# Altium PCB SpectrumAnalyserRecruitProjCallum.PcbDoc
Units mm, origin at the board's own origin, x right, y up, seen from the top; angles counter-clockwise.
Board outline 66 x 54 mm, 2 copper layers (Top Layer, Bottom Layer); 36 components, 32 nets, 102 pads, 6 vias.
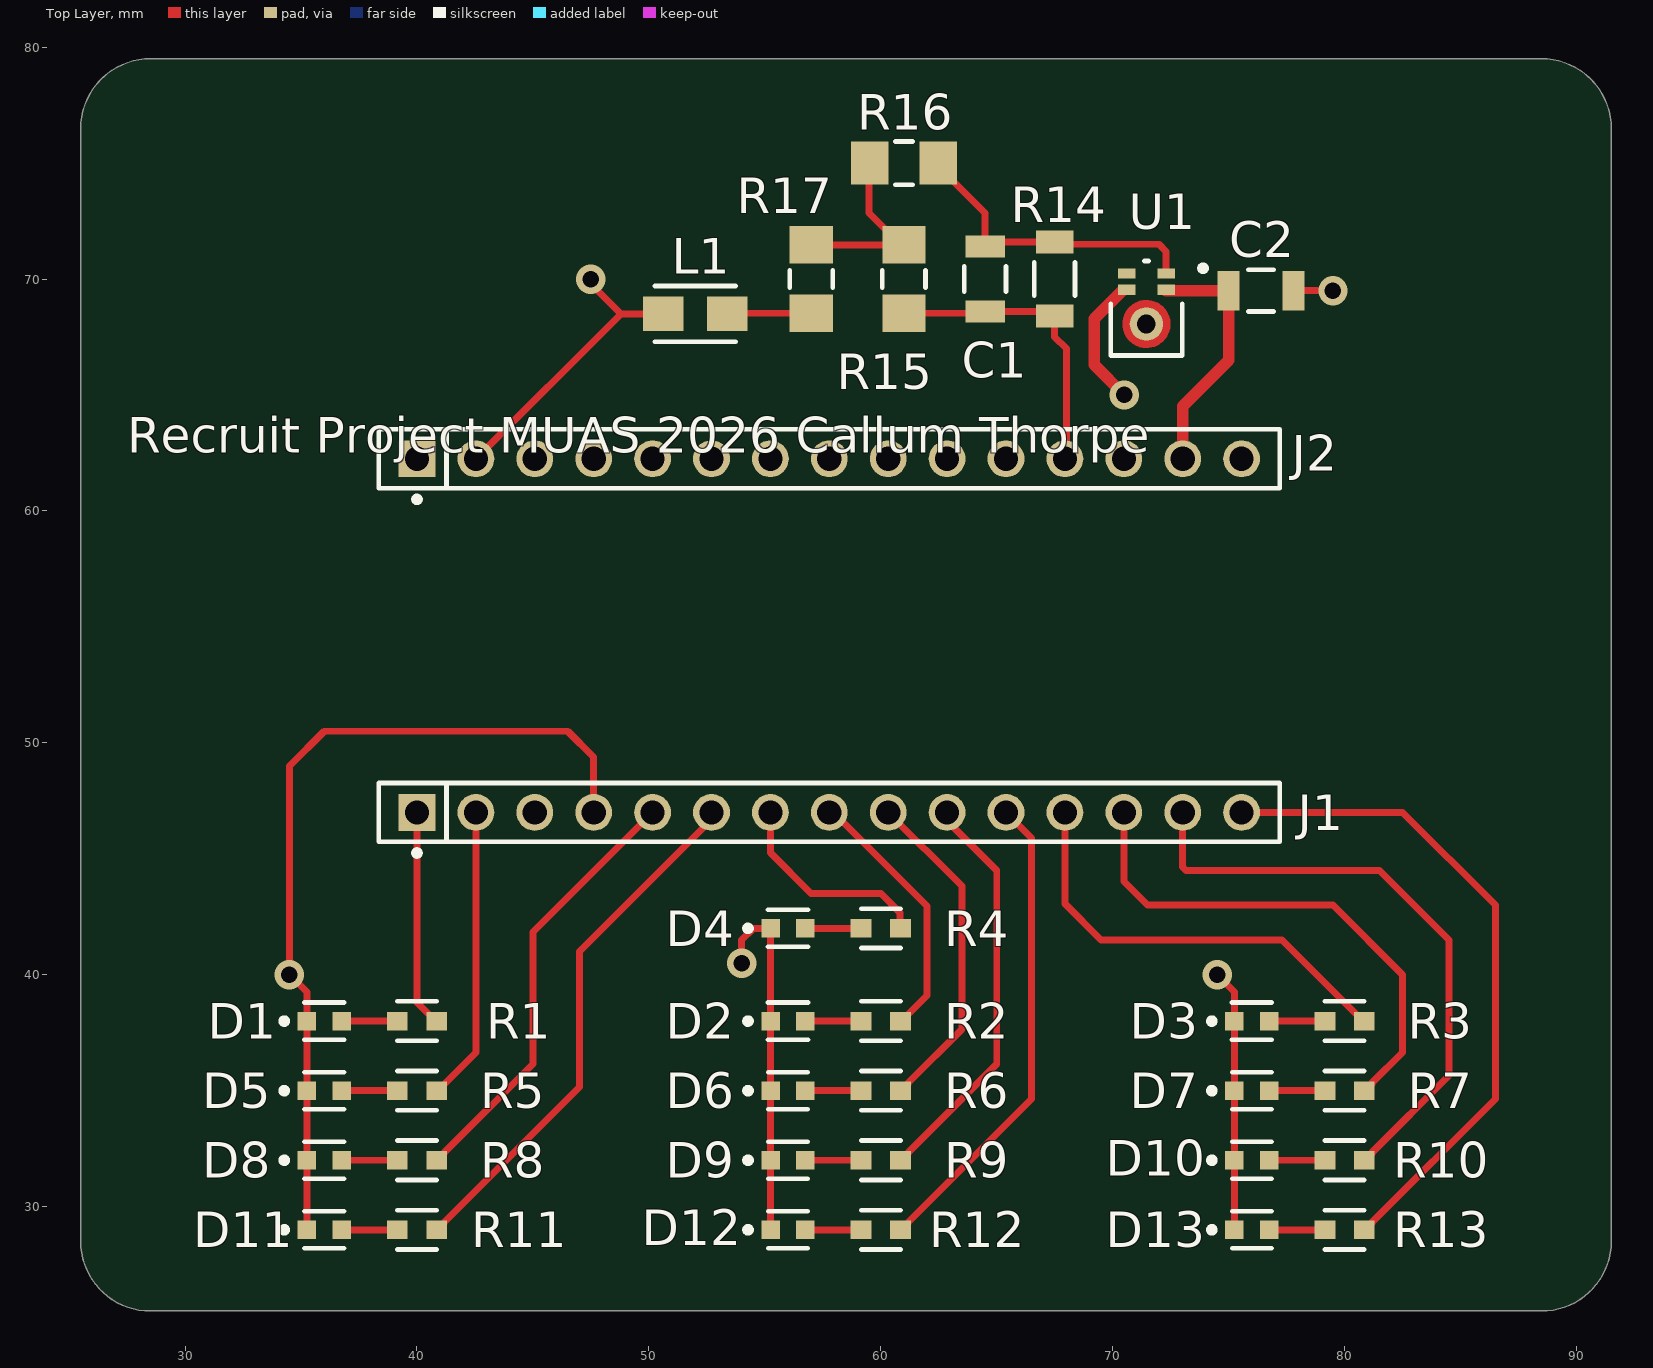
[diagram p0: Top Layer view]
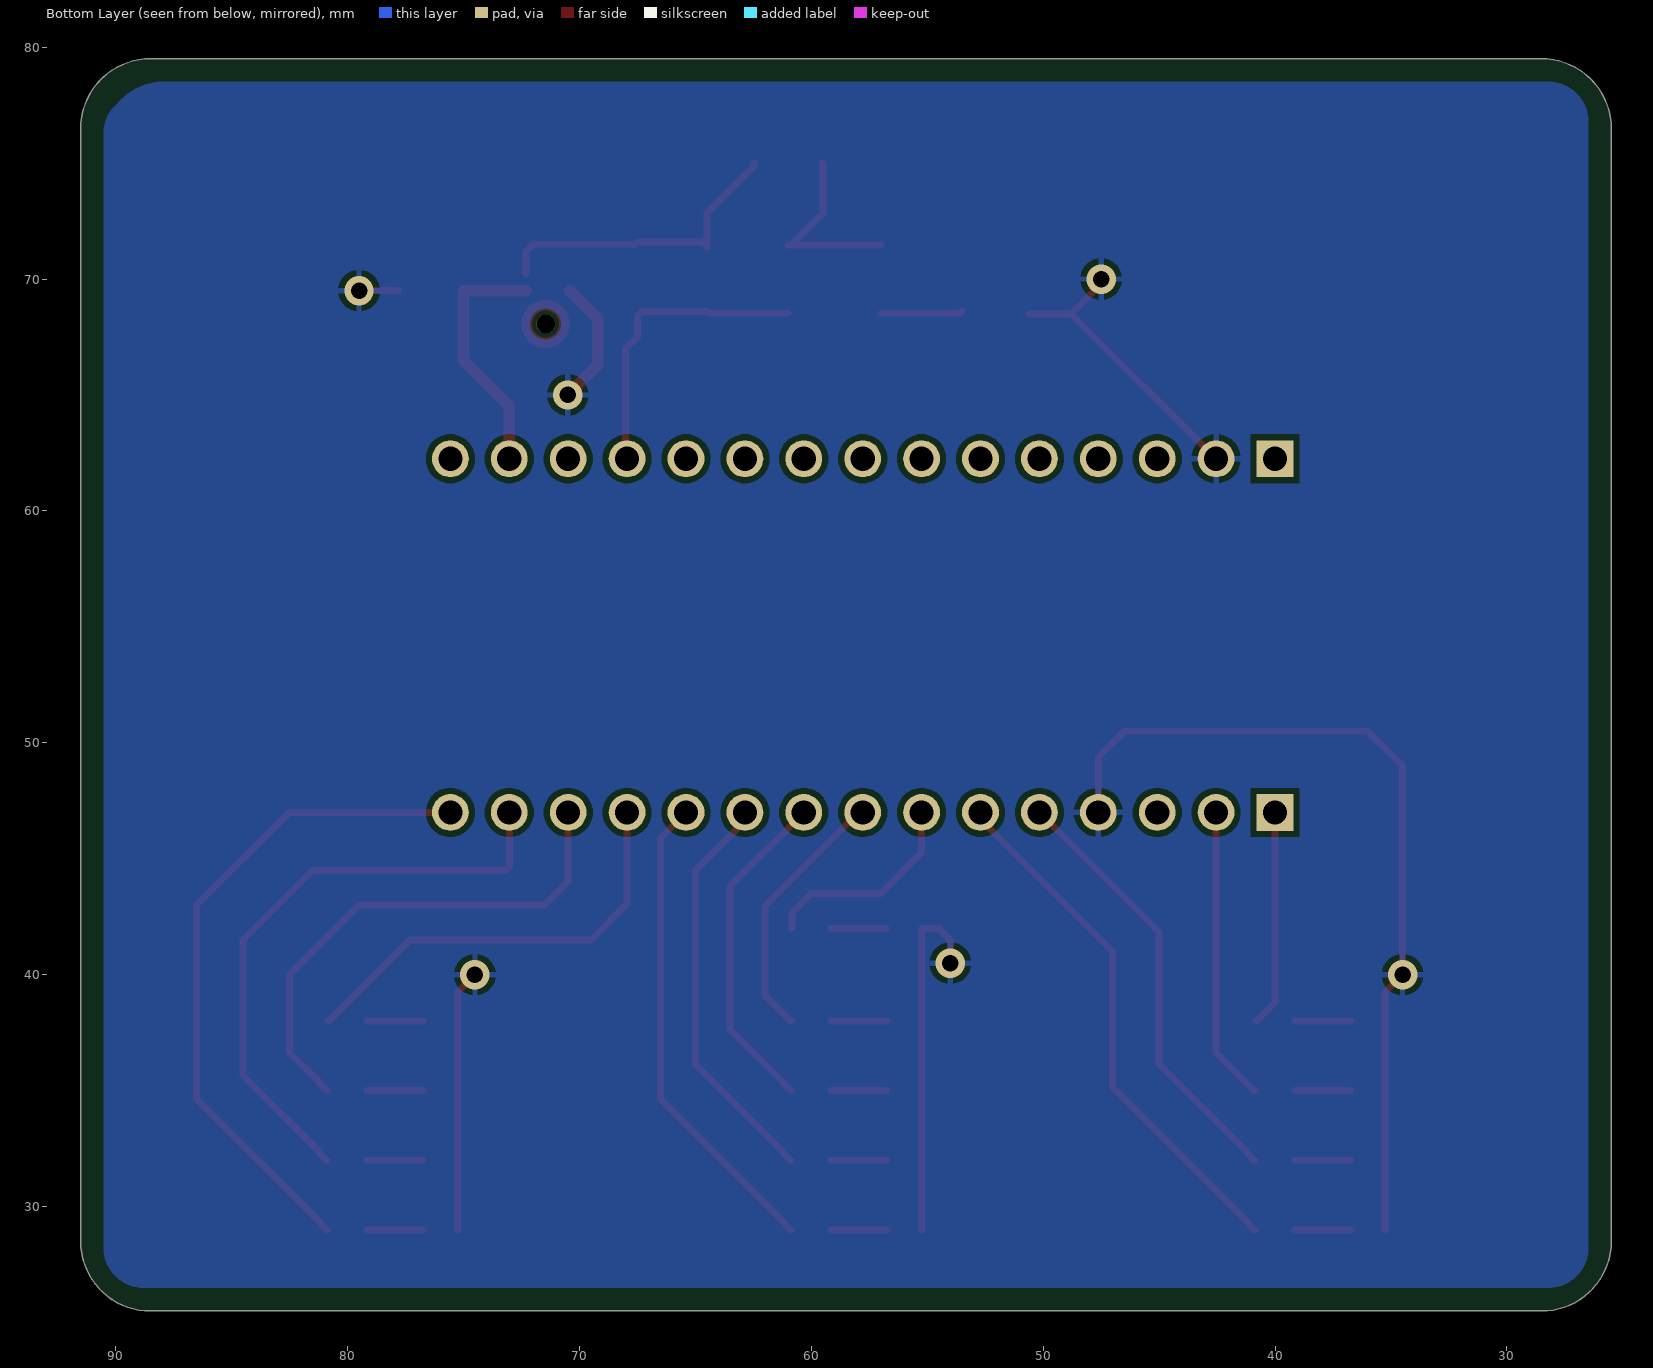
[diagram p1: Bottom Layer view, seen from below]
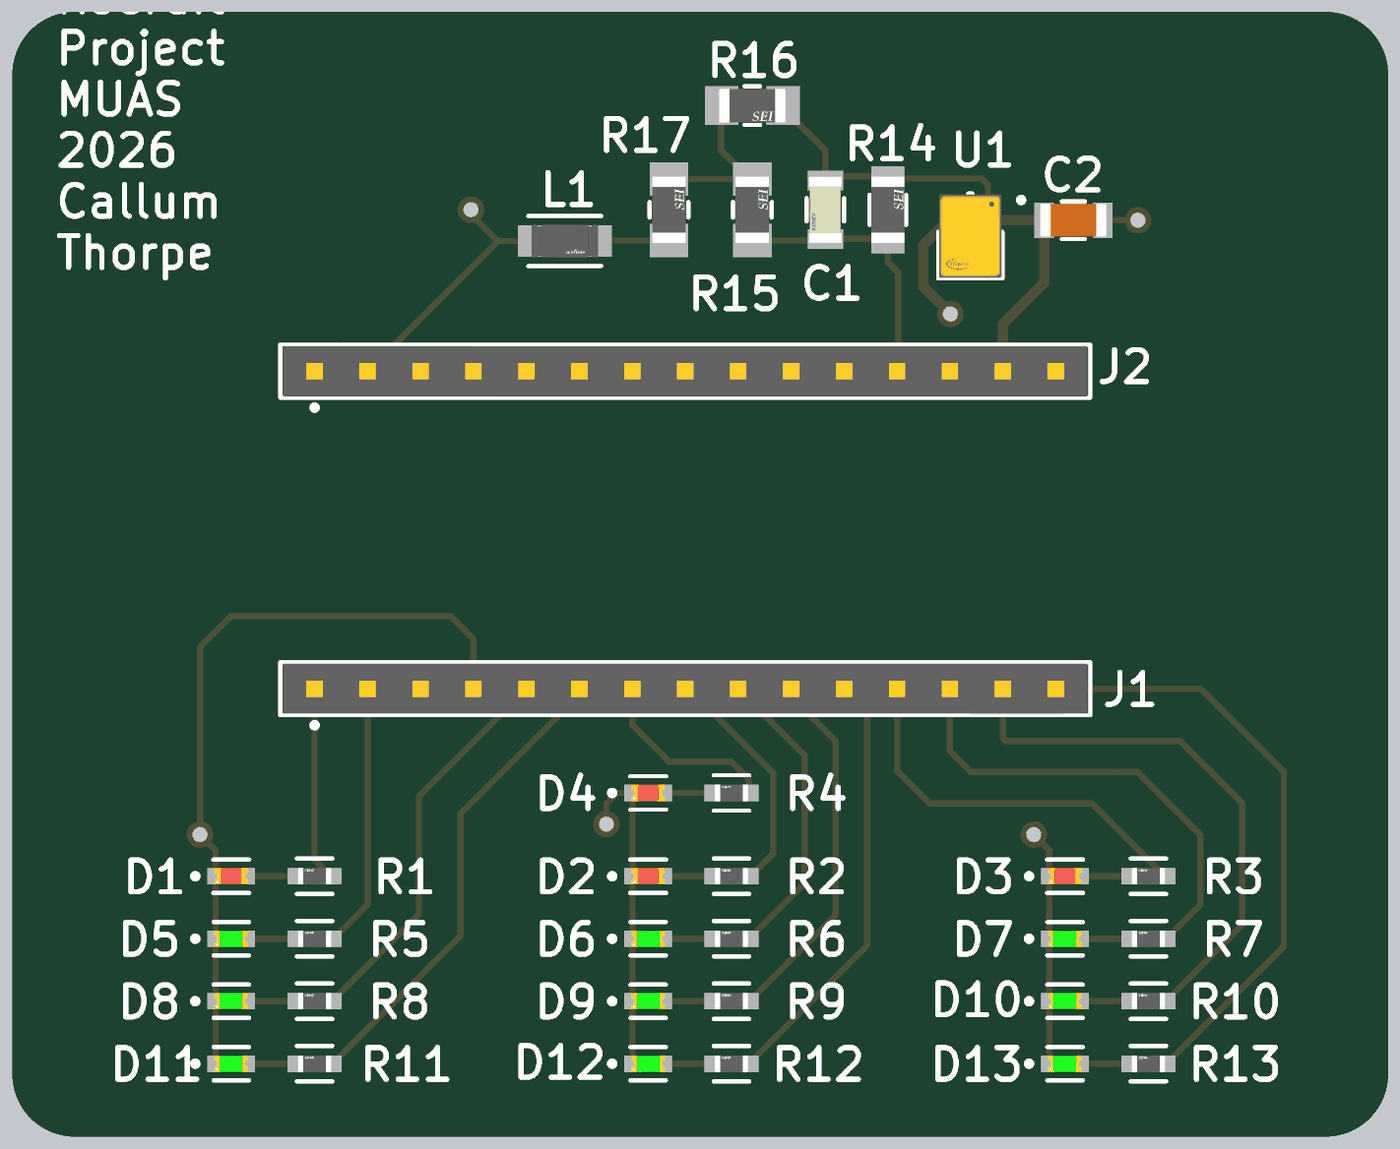
[diagram p2: 3D render of the assembled board from above, using the file's embedded part models]

## Layer stack, top to bottom
Top Solder: solder mask 0.0102, Solder Resist, Dk 3.5
Top Layer: signal copper 0.0356
Dielectric 1: dielectric 0.32, FR-4, Dk 4.8
Bottom Layer: signal copper 0.0356
Bottom Solder: solder mask 0.0102, Solder Resist, Dk 3.5

## Board outline
25.5,28.5 25.5,76.5 cw(c28.5,76.5) 28.5,79.5 88.5,79.5 cw(c88.5,76.5) 91.5,76.5 91.5,28.5 cw(c88.5,28.5) 88.5,25.5 28.5,25.5 cw(c28.5,28.5)

## Design rules (kind name [scope] priority, off if disabled: settings)
AssemblyTestPointUsage [All] p1: isadvanced=TRUE
AssemblyTestpoint [All] p1: isadvanced=TRUE testpointundercomponent=TRUE minsize=1.016 maxsize=2.54 preferedsize=1.524 minholesize=0 maxholesize=1.016 preferedholesize=0.813 testpointgrid=0.025 usegrid=TRUE gridtolerance=0 allowsidetop=TRUE allowsidebottom=TRUE
Clearance Clearance_1 [OnMid vs OnMid] p1: gap=0.25 ignorepadtopadclearanceinfootprint=FALSE sourcerule=39 cellrowname=All cellrowtype=0 cellcolname=All cellcoltype=0 innerlayers=TRUE
Clearance Clearance_2 [(ExistsOnLayer('Top Layer') Or ExistsOnLayer('Bottom Layer')) vs (ExistsOnLayer('Top Layer') Or ExistsOnLayer('Bottom Layer'))] p2: gap=0.25 ignorepadtopadclearanceinfootprint=FALSE sourcerule=39 cellrowname=All cellrowtype=0 cellcolname=All cellcoltype=0 outerlayers=TRUE
Clearance [All] p3: gap=0.254 ignorepadtopadclearanceinfootprint=FALSE ismatrix=TRUE
ComponentClearance [All] p1: isadvanced=TRUE gap=0.254 collisioncheckmode=3 verticalgap=0.254 showdistances=FALSE
FabricationTestPointUsage [All] p1: isadvanced=TRUE valid=0 allowmultiple=FALSE
FabricationTestpoint [All] p1: isadvanced=TRUE side=3 testpointundercomponent=TRUE minsize=1.016 maxsize=2.54 preferedsize=1.524 minholesize=0 maxholesize=1.016 preferedholesize=0.813 testpointgrid=0.025 allowsidetop=TRUE allowsidebottom=TRUE usegrid=TRUE gridtolerance=0
FanoutControl Fanout_BGA [IsBGA] p1: isadvanced=TRUE bgadir=Out bgaviamode=Centered fanoutstyle=Auto fanoutdirection=Alternating viagrid=0.025 // Fanout_BGA (Default Rule)
FanoutControl Fanout_LCC [IsLCC] p2: isadvanced=TRUE bgadir=Out bgaviamode=Centered fanoutstyle=Auto fanoutdirection=Alternating viagrid=0.025 // Fanout_LCC (Default Rule)
FanoutControl Fanout_SOIC [IsSOIC] p3: isadvanced=TRUE bgadir=Out bgaviamode=Centered fanoutstyle=Auto fanoutdirection=Alternating viagrid=0.025 // Fanout_SOIC (Default Rule)
FanoutControl Fanout_Small [(CompPinCount < 5)] p4: isadvanced=TRUE bgadir=Out bgaviamode=Centered fanoutstyle=Auto fanoutdirection=OutThenIn viagrid=0.025 // Fanout_Small (Default Rule)
FanoutControl Fanout_Default [All] p5: isadvanced=TRUE bgadir=Out bgaviamode=Centered fanoutstyle=Auto fanoutdirection=Alternating viagrid=0.025 // Fanout_Default (Default Rule)
Height [All] p1: isadvanced=TRUE minheight=0 maxheight=25.4 prefheight=12.7
HoleSize [All] p1: isadvanced=TRUE absolutevalues=TRUE maxlimit=2.54 minlimit=0.025 maxpercent=80.000 minpercent=20.000
HoleToHoleClearance [All] p1: isadvanced=TRUE gap=0.254 allowstackedmicrovias=TRUE
LayerPairs [All] p1: isadvanced=TRUE enforce=TRUE
MinimumSolderMaskSliver [All] p1: isadvanced=TRUE minsoldermaskwidth=0.15
NetAntennae [All] p1: isadvanced=TRUE netantennaetolerance=0
PasteMaskExpansion [All] p1: isadvanced=TRUE expansion=0
PlaneClearance [All] p1: isadvanced=TRUE clearance=0.508
PlaneConnect [All] p1: isadvanced=TRUE planeconnectstyle=Relief reliefexpansion=0.508 reliefentries=4 reliefconductorwidth=0.254 reliefairgap=0.254
PolygonConnect [All] p1: connectstyle=Relief reliefconductorwidth=0.254 reliefentries=4 polygonreliefangle="90 Angle" airgapwidth=0.254
RoutingCorners [All] p1: isadvanced=TRUE cornerstyle=45-Degree minsetback=2.54 maxsetback=2.54
RoutingPriority [All] p1: isadvanced=TRUE routingpriority=0
RoutingVias [All] p1: holewidth=0.711 width=1.27 viastyle="Through Hole" minholewidth=0.711 minwidth=1.27 maxholewidth=0.711 maxwidth=1.27
ShortCircuit [All] p1: isadvanced=TRUE allowed=FALSE
SilkToSilkClearance [All] p1: isadvanced=TRUE silktosilkclearance=0.254
SilkToSolderMaskClearance [IsPad] p1: isadvanced=TRUE minsilkscreentomaskgap=0.2 clearancetoexposedcopper=TRUE
SolderMaskExpansion [All] p1: isadvanced=TRUE expansion=0 istentingtop=FALSE
SupplyNets "Schematic Supply Nets" [InNet('GND')] p1: isadvanced=TRUE voltage=0.000
UnRoutedNet [All] p1: isadvanced=TRUE
UnpouredPolygon [All] p1: isadvanced=TRUE
Width MaxMinWidth_1 [InNet('3.3V')] p1: maxlimit=0.5 minlimit=0.3 preferedwidth=0.5 minimp=50.000000 maximp=50.000000 favimp=50.000000
Width MaxMinWidth_2 [InNet('GND')] p2: maxlimit=0.5 minlimit=0.3 preferedwidth=0.3 minimp=50.000000 maximp=50.000000 favimp=50.000000
Width [All] p3: maxlimit=0.5 minlimit=0.3 preferedwidth=0.3 minimp=50.000000 maximp=50.000000 favimp=50.000000
4 further rules are at their usual default settings.

## Components (designator, comment, footprint, x,y, rotation, side; value= is the part's Value field where it differs from the comment)
C1 "10nF 1206" FP-C1206C-EB-MFG 64.5,70 r90 top value="10,000 pF"
C2 "10uF 1206" FP-C1206C-EH-MFG 76.4,69.5 r0 top value=10uF
D1 "Red 0603" FP-SML-LX0603SIW-TR-MFG 36,38 r0 top
D2 "Red 0603" FP-SML-LX0603SIW-TR-MFG 56,38 r0 top
D3 "Red 0603" FP-SML-LX0603SIW-TR-MFG 76,38 r0 top
D4 "Red 0603" FP-SML-LX0603SIW-TR-MFG 56,42 r0 top
D5 "Green 0603" FP-LG_Q396-MFG 36,35 r0 top
D6 "Green 0603" FP-LG_Q396-MFG 56,35 r0 top
D7 "Green 0603" FP-LG_Q396-MFG 76,35 r0 top
D8 "Green 0603" FP-LG_Q396-MFG 36,32 r0 top
D9 "Green 0603" FP-LG_Q396-MFG 56,32 r0 top
D10 "Green 0603" FP-LG_Q396-MFG 76,32 r0 top
D11 "Green 0603" FP-LG_Q396-MFG 36,29 r0 top
D12 "Green 0603" FP-LG_Q396-MFG 56,29 r0 top
D13 "Green 0603" FP-LG_Q396-MFG 76,29 r0 top
J1 "Female Pin Header 15" FP-SSW-115-01-T-S-MFG 57.78,47 r0 top
J2 "Female Pin Header 15" FP-SSW-115-01-T-S-MFG 57.78,62.25 r0 top
L1 "15uH 1206" FP-LQH31CN_03-MFG 52,68.5 r0 top
R1 "180R 0603" FP-AF0603-MFG 40,38 r180 top
R2 "180R 0603" FP-AF0603-MFG 60,38 r180 top
R3 "180R 0603" FP-AF0603-MFG 80,38 r180 top
R4 "180R 0603" FP-AF0603-MFG 60,42 r180 top
R5 "180R 0603" FP-AF0603-MFG 40,35 r180 top
R6 "180R 0603" FP-AF0603-MFG 60,35 r180 top
R7 "180R 0603" FP-AF0603-MFG 80,35 r180 top
R8 "180R 0603" FP-AF0603-MFG 40,32 r180 top
R9 "180R 0603" FP-AF0603-MFG 60,32 r180 top
R10 "180R 0603" FP-AF0603-MFG 80,32 r180 top
R11 "180R 0603" FP-AF0603-MFG 40,29 r180 top
R12 "180R 0603" FP-AF0603-MFG 60,29 r180 top
R13 "180R 0603" FP-AF0603-MFG 80,29 r180 top
R14 "10kR 1206" FP-RMCF1206-MFG 67.5,70 r90 top
R15 "1kR 1206" FP-RMCF1206-IPC_A 61,70 r90 top
R16 "1kR 1206" FP-RMCF1206-IPC_A 61,75 r0 top
R17 "1kR 1206" FP-RMCF1206-IPC_A 57,70 r90 top
U1 "MEMS Analog Microphone" FP-PG-LLGA-5-MFG 71.456,68.74 r0 top

## Footprints (in the part's own frame and the unit in brackets; to place one, negate y for a bottom-side part, rotate by r counter-clockwise, add the part's x,y. Pads: shape width x height; smd on the part's side, far side on the other; paste and mask are expansions set on the pad)
FP-AF0603-MFG [mm]
  rect 0.9x0.8 smd paste+0 mask+0: 1(-0.85,0) 2(0.85,0)
  silkscreen extent -0.85,-0.85 0.85,0.85, body extent -1.4,-0.55 1.4,0.55, height 0.25
FP-C1206C-EB-MFG [mm]
  rect 0.95x1.7 smd paste+0 mask+0: 1(-1.4,0) 2(1.4,0)
  silkscreen extent -0.55,-0.9 0.55,0.9, body extent -2,-1 2,1, height 0.25
FP-C1206C-EH-MFG [mm]
  rect 0.95x1.7 smd paste+0 mask+0: 1(-1.4,0) 2(1.4,0)
  silkscreen extent -0.55,-0.9 0.55,0.9, body extent -2,-1 2,1, height 0.25
FP-LG_Q396-MFG [mm]
  rect 0.8x0.8 smd paste+0 mask+0: 1(-0.75,0) 2(0.75,0)
  silkscreen extent -1.85,-0.8 0.85,0.8, body extent -1.25,-0.55 1.25,0.55, height 0.25
FP-LQH31CN_03-MFG [mm]
  rect 1.75x1.5 smd paste+0 mask+0: 1(-1.375,0) 2(1.375,0)
  silkscreen extent -1.75,-1.2 1.75,1.2, body extent -2.35,-1 2.35,1, height 0.25
FP-PG-LLGA-5-MFG [mm]
  rect 0.75x0.45 smd paste-1000 mask+0: 1(0.85,1.5) 2(0.85,0.8) 3(-0.85,1.5) 4(-0.85,0.8)
  round 1.44 smd paste-1000 mask-1000: 5(0,-0.68)
  round 0.8 hole 0.8 unplated paste-2539.97 mask+0: ""(0,-0.68)
  Top Layer circle w0.46: c0,-0.68 r0.81
  silkscreen extent -1.54,-2.04 2.57,2.04, body extent -2.04,-2.54 2.04,2.54, height 0.25
FP-RMCF1206-IPC_A [mm]
  rect 1.604x1.858 smd paste+0 mask+0: 1(-1.476,0) 2(1.476,0)
  silkscreen extent -0.37,-0.93 0.37,0.93, body extent -2.78,-1.43 2.78,1.43, height 0.25
FP-RMCF1206-MFG [mm]
  rect 1x1.6 smd paste+0 mask+0: 1(-1.6,0) 2(1.6,0)
  silkscreen extent -0.73,-0.88 0.72,0.87, body extent -2.2,-0.97 2.2,0.97, height 0.25
FP-SML-LX0603SIW-TR-MFG [mm]
  rect 0.8x0.8 smd paste+0 mask+0: 1(-0.75,0) 2(0.75,0)
  silkscreen extent -1.85,-0.8 0.86,0.8, body extent -1.25,-0.56 1.25,0.56, height 0.25
FP-SSW-115-01-T-S-MFG [mm]
  rect 1.59x1.59 hole 1.04 paste-2539.97 mask+0: 1(-17.78,0)
  round 1.59 hole 1.04 paste-2539.97 mask+0: 2(-15.24,0) 3(-12.7,0) 4(-10.16,0) 5(-7.62,0) 6(-5.08,0) 7(-2.54,0) 8(0,0) 9(2.54,0) 10(5.08,0) 11(7.62,0) 12(10.16,0) 13(12.7,0) 14(15.24,0) 15(17.78,0)
  silkscreen extent -19.43,-1.87 19.43,1.27, body extent -19.53,-1.37 19.53,1.37, height 0.25

## Part data
C1: library part CMP-03020-033994-1, "C1206 10,000 pF C0G 5.00% 50 V", Capacitance="10,000 pF", Manufacturer=KEMET, Manufacturer Part Number=C1206C103J5GACAUTO, Package=C1206C-EB, Temperature="-55°C to +150°C", Temperature Characteristic=C0G, Temperature Coefficient=15%, Temperature Range High=+150°C, Temperature Range Low=-55°C, Tolerance=0.05, Voltage Rating="50 V", Automotive=Yes, Automotive Grade="Grade 0", Category=Cap, ComponentLink2Description=Datasheet, ComponentLink2URL=https://content.kemet.com/datasheets/KEM_C1007_X8R_ULTRA_150C_SMD.pdf, Device Class L1="Passive Components", Device Class L2=Capacitors, Device Class L3="Ceramic Capacitors", Height=0.88mm, Ipc Land Pattern Name=CAPC320160X78, Lead Free=Yes, Material=Ceramic, Octopart=https://octopart.com/c1206c103j5gacauto-kemet-88376196, RoHS=TRUE
C2: library part CMP-03020-003375-1, "CAP CER 10UF 16V X7R 1206C1206C106K4RACAUTO", Capacitance=10uF, Manufacturer=Kemet, Manufacturer Part Number=C1206C106K4RACAUTO, Package=C1206C-EH, Temperature="-55°C to +125°C", Temperature Characteristic=X7R, Temperature Coefficient=15%, Temperature Range High=+125°C, Temperature Range Low=-55°C, Tolerance=10%, Voltage Rating=16V, Automotive=Yes, Automotive Grade="Grade 1", Category=Cap, ComponentLink2Description=Datasheet, ComponentLink2URL=https://content.kemet.com/datasheets/KEM_C1023_X7R_AUTO_SMD.pdf, Device Class L1="Passive Components", Device Class L2=Capacitors, Device Class L3="Ceramic Capacitors", Digikey Description="CAP CER 10UF 16V X7R 1206", Height=1.8mm, Ipc Land Pattern Name=CAPC320160X160, Lead Free=Yes, Material=Ceramic, Mouser Description="Multilayer Ceramic Capacitors MLCC - SMD/SMT 10uF 16V 10% AUTO", Octopart=https://octopart.com/c1206c106k4racauto-kemet-20072893, RoHS=TRUE
D1 D2 D3 D4: library part CMP-57192-000009-1, "LED RED DIFFUSED SMD", Case Code (Imperial)=0603, Case Code (Metric)=1608, Color=Red, Forward Current=20mA, Forward Voltage=2V, Lens Color=White, Max Operating Temperature=85°C, Min Operating Temperature=-25°C, Package Quantity=1, Power Rating=50mW, Approvals=UL, Case/Package=0603, Dominant Wavelength=636nm, Height=0.6mm, Illumination Color=Red, Lead Free="Lead Free", Length=1.6mm, Lens Style=Diffused, Lens Transparency=Diffused, Luminous Intensity=60mcd, Moisture Sensitivity Level=2, Mount="Surface Mount", Number of LEDs=1, Number of Pins=2, Packaging="Tape and Reel", REACH SVHC="No SVHC", RoHS Compliant=Yes, Test Current=20mA, Viewing Angle=140°, Wavelength=636nm, Width=0.8mm
D5 D6 D7 D8 D9 D10 D11 D12 D13: library part CMP-62016-000069-1, "LED GREEN DIFFUSED 0603 SMD", Case Code (Imperial)=0603, Case Code (Metric)=1608, Color=Green, Forward Current=20mA, Forward Voltage=2V, Lens Color=White, Case/Package=0603, Dominant Wavelength=573nm, Height=0.4mm, Length=1.6mm, Lens Size=0.8mm, Lens Style=Flat, Lens Transparency=Diffused, Luminous Intensity=163mcd, Mount="Surface Mount", Packaging="Tape and Reel", REACH SVHC="No SVHC", RoHS Compliant=Yes, Test Current=20mA, Viewing Angle=120°, Wavelength=573nm, Width=0.8mm
J1 J2: library part CMP-02766-001723-1, "CONN RCPT 15POS 0.1 TIN PCB", Color=Black, Contact Resistance=10mR, Max Current Rating=6.9A, Max Operating Temperature=105°C, Max Voltage Rating (AC)=550V, Min Operating Temperature=-55°C, Connector Type=Receptacle, Contact Material=Bronze, Contact Plating=Tin, Contact Type="Female Socket", Depth=2.41mm, Gender=Receptacle, Housing Color=Black, Housing Material=Polymer, Lead Free="Lead Free", Length=38.61mm, Mating Cycles=100, Mount="Through Hole", Number of Contacts=15, Number of Positions=15, Number of Rows=1, Orientation=Straight, Packaging=Bulk, Pitch=0.1inch, Radiation Hardening=No, REACH SVHC="No SVHC", RoHS Compliant=Yes, Series=SSW, Termination=Solder, Width=2.41mm
L1: library part CMP-06042-008727-1, "Wire Wound Ferrite Inductor for General Circuits 15μH ±5% 3.9Ω 90mA 1206", Case Code (Imperial)=1206, Case Code (Metric)=3216, Current Rating=90mA, DC Resistance (DCR)=3R, Inductance=15uH, Max Operating Temperature=85°C, Min Operating Temperature=-40°C, Package Quantity=2000, Resistor Type=Wirewound, Self Resonant Frequency=16MHz, Test Frequency=1MHz, Tolerance=5%, Case/Package=1206, Core Material=Ferrite, DC Current=90mA, Depth=1.8mm, Height=1.8mm, Height - Seated (Max)=0.078inch, Lead Free="Lead Free", Length=0.126inch, Max DC Current=90mA, Military Standard=Not, Mount="Surface Mount", Packaging="Tape and Reel", Q Factor=35, Radiation Hardening=No, Shielding=Unshielded, Termination=SMD/SMT, Weight=0.001023oz, Width=0.063inch
R1 R2 R3 R4 R5 R6 R7 R8 R9 R10 R11 R12 R13: library part CMP-03412-044825-1, "Anti-Sulfurated Chip Resistors Automotive Grade 180Ω 1% 100ppm/°C 0603", Case/Package=0603, Max Operating Temperature=155°C, Max Power Dissipation=100mW, Min Operating Temperature=-55°C, Resistance=180R, Resistor Type="Thick Film", Temperature Coefficient=100ppm/°C, Tolerance=1%, Features="Moisture Resistant", Height=0.022inch, Length=0.063inch, Number of Terminations=2, Packaging="Tape and Reel", RoHS Compliant=Yes, Series=AF, Width=0.031inch
R14: library part CMP-26527-002036-1, "10kΩ ±1% 0.25W 1206 Thick Film Chip Resistor AEC-Q200 compliant", Case Code (Imperial)=1206, Case Code (Metric)=3216, Max Operating Temperature=155°C, Max Power Dissipation=250mW, Min Operating Temperature=-55°C, Resistance=10kR, Resistor Type="Thick Film", Temperature Coefficient=100ppm/°C, Tolerance=1%, Case/Package=1206, Construction=Rectangular, Contact Plating=Tin, Depth=1.6mm, Features="Automotive AEC-Q200", Height=0.028inch, Length=0.126inch, Military Standard=Not, Mount="Surface Mount", Number of Terminations=2, Packaging="Tape and Reel", Radiation Hardening=No, RoHS Compliant=Yes, Series=RMCF, Width=0.063inch
R15 R16 R17: library part CMP-26527-006126-1, "1kΩ ±5% 0.25W 1206 Thick Film Chip Resistor AEC-Q200 compliant", Case Code (Imperial)=1206, Case Code (Metric)=3216, Max Operating Temperature=155°C, Max Power Dissipation=250mW, Min Operating Temperature=-55°C, Resistance=1kR, Resistor Type="Thick Film", Temperature Coefficient=200ppm/°C, Tolerance=5%, Case/Package=1206, Contact Plating=Tin, Features="Automotive AEC-Q200", Height=0.028inch, Length=0.126inch, Mount="Surface Mount", Number of Terminations=2, Packaging="Tape and Reel", Radiation Hardening=No, RoHS Compliant=Yes, Series=RMCF, Width=0.063inch
U1: library part CMP-32934-000001-1, "MICROPHONES_DIFFERENTIAT PG-LLGA IM73A135V01XTSA1"

## Via types
v1: diameter 1.27, hole 0.711, Top Layer to Bottom Layer, tented both sides, 6 vias

## Nets (pads, with @x,y where several pads share a name; then routed paths per layer and width w, separated by ;. In a path a pad name is that pad's centre, name@x,y a point inside that pad or via, vN(x,y) a via of type N, cw(c..) or ccw(c..) an arc to the next point about the centre after c; other vN are vias at no path point)
3.3V: C2.1 J2.14 U1.2 | length 10.8
  Top Layer w0.5: U1.2@72.3,69.5 C2.1 75,66.5 73.02,64.52 J2.14
D0: J1.2 R5.1 | length 12.7
  Top Layer w0.3: R5.1 40.9,35 42.54,36.64 J1.2
D1: J1.1 R1.1 | length 9.4
  Top Layer w0.3: J1.1 40,38.8 40.8,38 R1.1
D2: J1.5 R8.1 | length 18.9
  Top Layer w0.3: R8.1 40.9,32 41.173,32.273 41.173,32.323 45,36.15 45,41.84 J1.5
D3: J1.6 R11.1 | length 22.9
  Top Layer w0.3: R11.1 40.9,29 41.173,29.273 41.173,29.323 47,35.15 47,41 52.7,46.7 J1.6
D4: J1.7 R4.1 | length 9.1
  Top Layer w0.3: J1.7 55.24,45.26 57,43.5 60,43.5 60.826,42.674 60.826,42.024 R4.1
D5: J1.8 R2.1 | length 11.4
  Top Layer w0.3: J1.8 57.958,47 62,42.958 62,39.1 60.9,38 R2.1
D6: J1.9 R6.1 | length 14.4
  Top Layer w0.3: J1.9 63.5,43.82 63.5,37.65 61.173,35.323 61.173,35.273 60.9,35 R6.1
D7: J1.10 R9.1 | length 17.6
  Top Layer w0.3: R9.1 60.9,32 61.173,32.273 61.173,32.323 65,36.15 65,44.5 62.86,46.64 J1.10
D8: J1.11 R12.1 | length 20.8
  Top Layer w0.3: R12.1 60.9,29 61.173,29.273 61.173,29.323 66.5,34.65 66.5,45.9 J1.11
D9: J1.12 R3.1 | length 18.9
  Top Layer w0.3: J1.12 67.94,43.06 69.5,41.5 77.3,41.5 80.8,38 R3.1
D10: J1.13 R7.1 | length 22.4
  Top Layer w0.3: J1.13 70.48,44.02 71.5,43 79.5,43 82.5,40 82.5,36.65 81.173,35.323 81.173,35.273 80.9,35 R7.1
D11: J1.14 R10.1 | length 26.2
  Top Layer w0.3: J1.14 73.02,44.649 73.169,44.5 81.5,44.5 84.5,41.5 84.5,35.65 81.173,32.323 81.173,32.273 80.9,32 R10.1
D12: J1.15 R13.1 | length 29
  Top Layer w0.3: J1.15 82.5,47 86.5,43 86.5,34.65 81.173,29.323 81.173,29.273 80.9,29 R13.1
GND: C2.2 D1.1 D2.1 D3.1 D4.1 D5.1 D6.1 D7.1 D8.1 D9.1 D10.1 D11.1 D12.1 D13.1 J1.4 J2.2 L1.1 U1.4 | length 83.6
  Top Layer w0.3: D11.1 D8.1 D5.1 D1.1 35.25,39.25 v1(34.5,40) 34.5,49 36,50.5 46.5,50.5 47.62,49.38 J1.4 ; J2.2 48.79,68.5 ; v1(47.5,70) 47.5,69.79 48.79,68.5 ; L1.1 48.79,68.5 ; v1(54,40.5) 54,41.5 54.5,42 D4.1 D2.1 D6.1 D9.1 D12.1 ; v1(74.5,40) 75.25,39.25 D3.1 D7.1 D10.1 D13.1 ; C2.2 v1(79.5,69.5)
  Top Layer w0.5: U1.4@70.416,69.5 69.2,68.284 69.2,66.3 v1(70.5,65)
NetC1_1: C1.1 J2.12 R14.1 R15.1 | length 13
  Top Layer w0.3: R15.1 64.424,68.524 C1.1 67.3,68.6 R14.1 67.5,67.5 68,67 68,62.31 J2.12
NetC1_2: C1.2 R14.2 R16.2 U1.1 | length 13.4
  Top Layer w0.3: R16.2 62.476,74.873 64.5,72.848 C1.2 64.7,71.6 R14.2 67.6,71.5 72,71.5 72.306,71.194 U1.1
NetD1_2: D1.2 R1.2 | length 2.4
  Top Layer w0.3: D1.2 R1.2
NetD2_2: D2.2 R2.2 | length 2.4
  Top Layer w0.3: D2.2 R2.2
NetD3_2: D3.2 R3.2 | length 2.4
  Top Layer w0.3: D3.2 R3.2
NetD4_2: D4.2 R4.2 | length 2.4
  Top Layer w0.3: D4.2 R4.2
NetD5_2: D5.2 R5.2 | length 2.4
  Top Layer w0.3: D5.2 R5.2
NetD6_2: D6.2 R6.2 | length 2.4
  Top Layer w0.3: D6.2 R6.2
NetD7_2: D7.2 R7.2 | length 2.4
  Top Layer w0.3: D7.2 R7.2
NetD8_2: D8.2 R8.2 | length 2.4
  Top Layer w0.3: D8.2 R8.2
NetD9_2: D9.2 R9.2 | length 2.4
  Top Layer w0.3: D9.2 R9.2
NetD10_2: D10.2 R10.2 | length 2.4
  Top Layer w0.3: D10.2 R10.2
NetD11_2: D11.2 R11.2 | length 2.4
  Top Layer w0.3: D11.2 R11.2
NetD12_2: D12.2 R12.2 | length 2.4
  Top Layer w0.3: D12.2 R12.2
NetD13_2: D13.2 R13.2 | length 2.4
  Top Layer w0.3: D13.2 R13.2
NetL1_2: L1.2 R17.1 | length 3.5
  Top Layer w0.3: L1.2@53.5,68.625 53.601,68.524 R17.1
NetR15_2: R15.2 R16.1 R17.2 | length 8.2
  Top Layer w0.3: R17.2 R15.2 60.873,71.476 59.5,72.848 59.5,74.976 R16.1
pads on no net: J1.3 J2.1 J2.3 J2.4 J2.5 J2.6 J2.7 J2.8 J2.9 J2.10 J2.11 J2.13 J2.15 U1. U1.3 U1.5

## Polygon pours and split planes (outlines as drawn)
GND on Bottom Layer "GND_L02_P004" (solid, pour order 4): 26.5,28.207 ccw(c28.207,28.207) 27,27 ccw(c28.207,28.207) 28.207,26.5 88.793,26.5 ccw(c88.793,28.207) 90,27 ccw(c88.793,28.207) 90.5,28.207 90.5,76.293 ccw(c88.793,76.293) 90,77.5 89.744,77.756 ccw(c87.948,75.96) 87.948,78.5 28.207,78.5 ccw(c28.207,76.793) 27,78 ccw(c28.207,76.793) 26.5,76.793 26.5,41.5

## Silkscreen, mask and mechanical layers (free items; w line width, h text height)
Top Overlay:
  text "Recruit Project MUAS 2026 Callum Thorpe" at 27.5,62.5 h1.52
Mechanical 1:
  the board outline again, w0.254